# EAGLE board experimentboard (EAGLE 7.7.0)
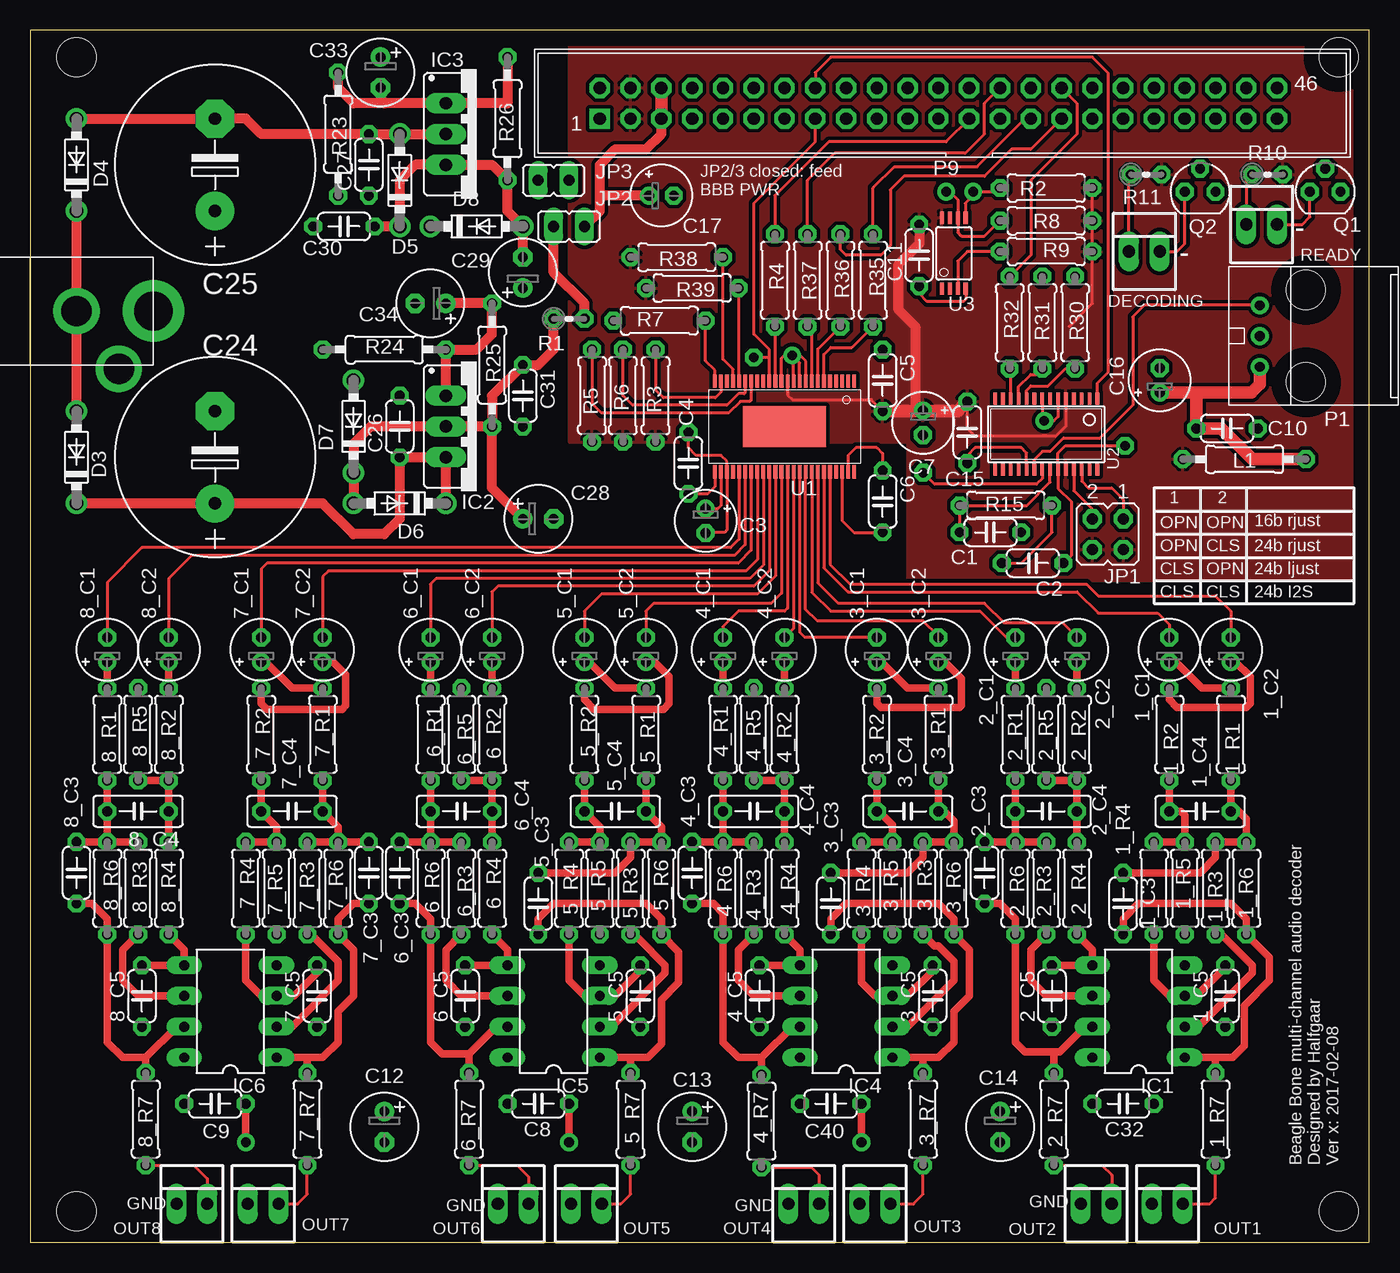
[diagram p0: board, top side]
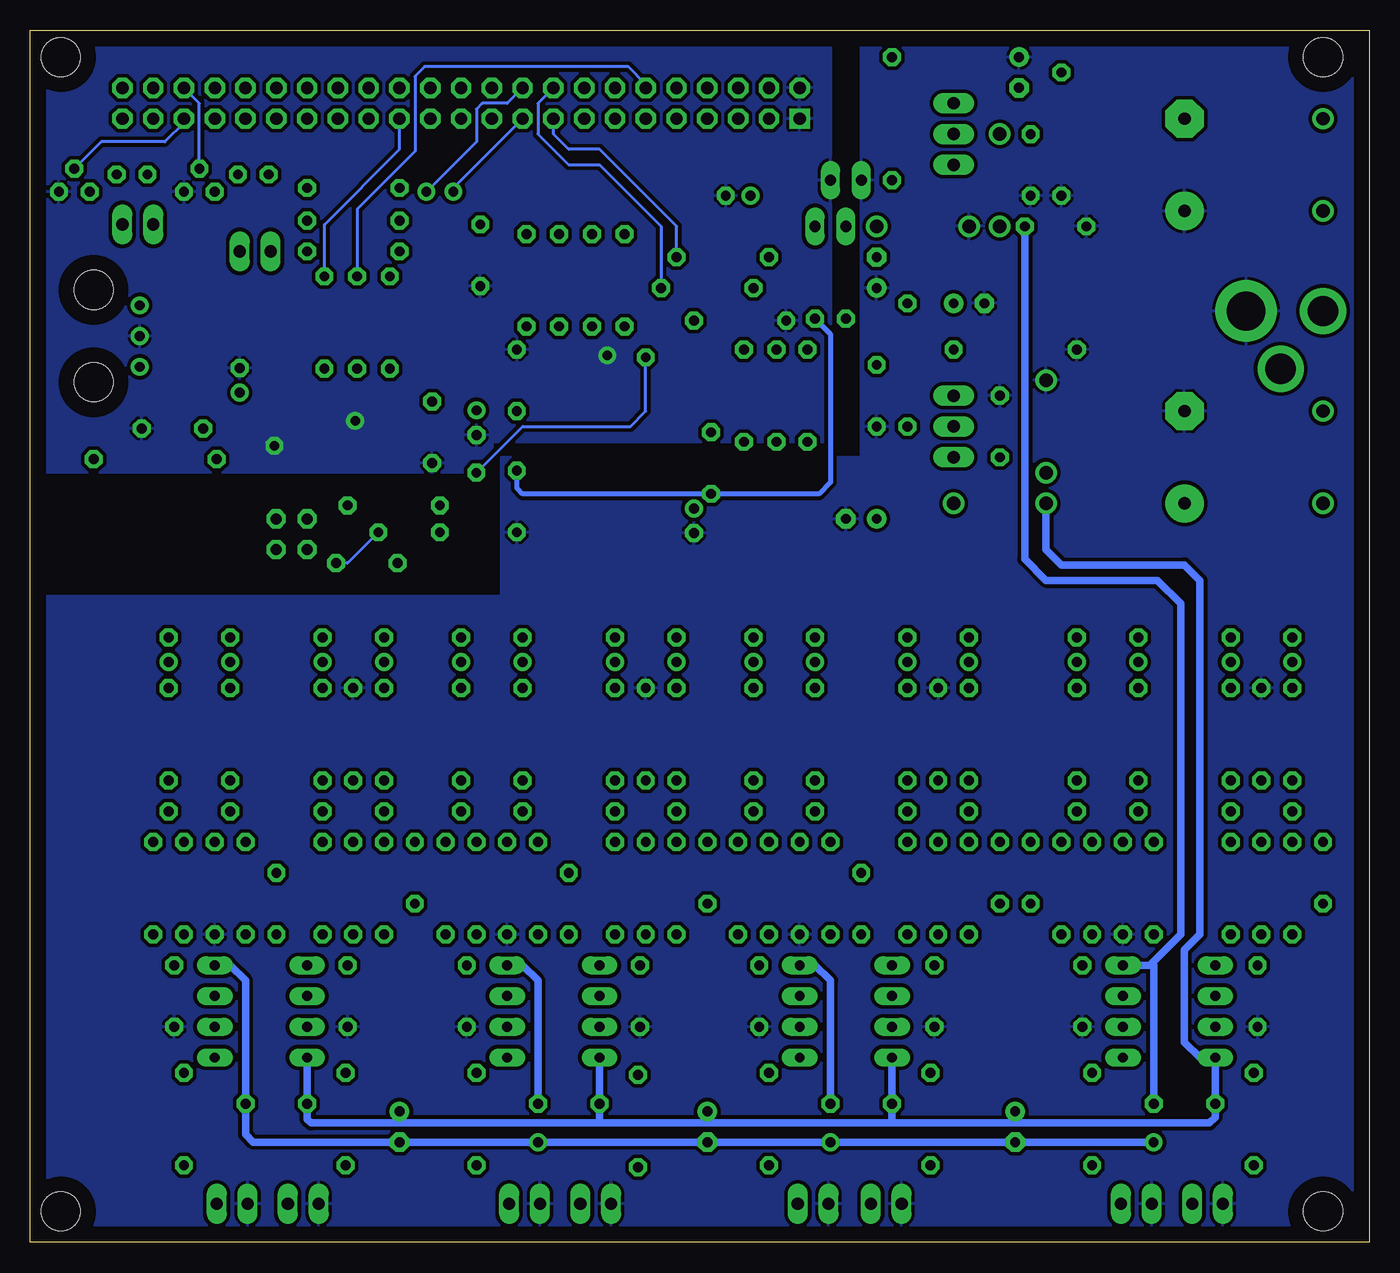
[diagram p1: board, bottom side, seen from below]

Size 110.47 x 100 mm. Coordinates in mm from the lower left corner, seen from the top.
Outline: 0,0 110.47,0 110.47,100 0,100 0,0
Copper layers (1*16): Top 0.035mm / dielectric 1.6mm / Bottom 0.035mm
Design rules "verysmall": minimum track width 10mil, minimum drill 31mil, track to track 9mil, track to pad 8mil, pad to pad 7mil, via to via 20mil, smd to smd 7mil, copper to edge 50mil, drill to drill 40mil, minimum pad ring 13mil, minimum via ring 13mil, stop-mask expansion 4mil, vias tented up to drill 0mil, thermal gap 10mil
Holes 3.2 mm at 3.81,97.79 107.95,97.79 107.95,2.54 3.81,2.54

## Footprints (pad centres in the part's own frame; a part is rotated, then mirrored left to right if it is on the bottom)
E2-5 = drill 0.813 pad 1.27: + -1.016,0 | drill 0.813 pad 1.27 octagon: - 1.016,0
C050-024X044 = drill 0.813 octagon: 1 -2.54,0; 2 2.54,0
C050-025X075 = drill 0.813 octagon: 1 -2.54,0; 2 2.54,0
0207/7 = drill 0.813 octagon: 1 -3.81,0; 2 3.81,0
ADAPTER-PLUG-5.5MM = drill 2.5 pad 3.81: 1 4.445,-7.62; 2 -0.318,-11.113 | drill 3.2 pad 5.08: 3 4.445,-13.97
E2,5-6 = drill 0.813 pad 1.6: + -1.27,0 | drill 0.813 pad 1.6 octagon: - 1.27,0
E7,5-16 = drill 1.016 pad 3.15: + -3.81,0 | drill 1.016 pad 3.15 octagon: - 3.81,0
DO41-7.6 = drill 1.1 pad 1.7: A 3.81,0; C -3.81,0
22-23-2021 = drill 1 long: 1 -1.27,0; 2 1.27,0
DIL8 = drill 0.813 long: 1 -3.81,-3.81; 2 -1.27,-3.81; 3 1.27,-3.81; 4 3.81,-3.81; 5 3.81,3.81; 6 1.27,3.81; 7 -1.27,3.81; 8 -3.81,3.81
317TS = drill 1.016 long: 1 -2.54,-2.54; 2 0,-2.54; 3 2.54,-2.54
337TS = drill 1.016 long: 1 -2.54,-2.54; 2 0,-2.54; 3 2.54,-2.54
JP2Q = drill 0.914 octagon: 1 -1.27,-1.27; 2 1.27,-1.27; 3 -1.27,1.27; 4 1.27,1.27
JP1 = drill 0.914 long: 1 0,-1.27; 2 0,1.27
0207/10 = drill 0.813 octagon: 1 -5.08,0; 2 5.08,0
PLR135/T9 = drill 0.8 pad 1.422: 1 8.255,11.43; 2 5.715,11.43; 3 3.175,11.43 | hole 3.2: 1.905,7.62; 9.525,7.62
HEADERS23-2 = drill 1.016 square: 1 -5.08,-1.27 | drill 1.016 octagon: 2 -5.08,1.27; 3 -2.54,-1.27; 4 -2.54,1.27; 5 0,-1.27; 6 0,1.27; 7 2.54,-1.27; 8 2.54,1.27; 9 5.08,-1.27; 10 5.08,1.27; 11 7.62,-1.27; 12 7.62,1.27; 13 10.16,-1.27; 14 10.16,1.27; 15 12.7,-1.27; 16 12.7,1.27; 17 15.24,-1.27; 18 15.24,1.27; 19 17.78,-1.27; 20 17.78,1.27; 21 20.32,-1.27; 22 20.32,1.27; 23 22.86,-1.27; 24 22.86,1.27; 25 25.4,-1.27; 26 25.4,1.27; 27 27.94,-1.27; 28 27.94,1.27; 29 30.48,-1.27; 30 30.48,1.27; 31 33.02,-1.27; 32 33.02,1.27; 33 35.56,-1.27; 34 35.56,1.27; 35 38.1,-1.27; 36 38.1,1.27; 37 40.64,-1.27; 38 40.64,1.27; 39 43.18,-1.27; 40 43.18,1.27; 41 45.72,-1.27; 42 45.72,1.27; 43 48.26,-1.27; 44 48.26,1.27; 45 50.8,-1.27; 46 50.8,1.27
SOT54E = drill 0.813 octagon: D -1.27,0; G 0,1.905; S 1.27,0
0204V = drill 0.813 octagon: 1 -1.27,0; 2 1.27,0
HTSSOP48DFD = smd 0.3 x 1.1: 1 -5.75,-3.75; 2 -5.25,-3.75; 3 -4.75,-3.75; 4 -4.25,-3.75; 5 -3.75,-3.75; 6 -3.25,-3.75; 7 -2.75,-3.75; 8 -2.25,-3.75; 9 -1.75,-3.75; 10 -1.25,-3.75; 11 -0.75,-3.75; 12 -0.25,-3.75; 13 0.25,-3.75; 14 0.75,-3.75; 15 1.25,-3.75; 16 1.75,-3.75; 17 2.25,-3.75; 18 2.75,-3.75; 19 3.25,-3.75; 20 3.75,-3.75; 21 4.25,-3.75; 22 4.75,-3.75; 23 5.25,-3.75; 24 5.75,-3.75; 25 5.75,3.75; 26 5.25,3.75; 27 4.75,3.75; 28 4.25,3.75; 29 3.75,3.75; 30 3.25,3.75; 31 2.75,3.75; 32 2.25,3.75; 33 1.75,3.75; 34 1.25,3.75; 35 0.75,3.75; 36 0.25,3.75; 37 -0.25,3.75; 38 -0.75,3.75; 39 -1.25,3.75; 40 -1.75,3.75; 41 -2.25,3.75; 42 -2.75,3.75; 43 -3.25,3.75; 44 -3.75,3.75; 45 -4.25,3.75; 46 -4.75,3.75; 47 -5.25,3.75; 48 -5.75,3.75 | smd 6.858 x 3.4: EXP 0,0
TSSOP28 = smd 0.305 x 0.991: 1 -4.225,-2.918; 2 -3.575,-2.918; 3 -2.925,-2.918; 4 -2.275,-2.918; 5 -1.625,-2.918; 6 -0.975,-2.918; 7 -0.325,-2.918; 8 0.325,-2.918; 9 0.975,-2.918; 10 1.625,-2.918; 11 2.275,-2.918; 12 2.925,-2.918; 13 3.575,-2.918; 14 4.225,-2.918; 15 4.225,2.918; 16 3.575,2.918; 17 2.925,2.918; 18 2.275,2.918; 19 1.625,2.918; 20 0.975,2.918; 21 0.325,2.918; 22 -0.325,2.918; 23 -0.975,2.918; 24 -1.625,2.918; 25 -2.275,2.918; 26 -2.925,2.918; 27 -3.575,2.918; 28 -4.225,2.918
TSSOP8 = smd 0.35 x 1: 1 -0.975,-2.925; 2 -0.325,-2.925; 3 0.325,-2.925; 4 0.975,-2.925; 5 0.975,2.925; 6 0.325,2.925; 7 -0.325,2.925; 8 -0.975,2.925

## Placement (x,y rotation side)
1_C1  10 µF  [E2-5]  93.98,48.9 90 top
1_C2  10 µF  [E2-5]  99.06,48.9 90 top
1_C3  680pF  [C050-024X044]  90.17,27.94 270 top
1_C4  3.3nF  [C050-025X075]  96.52,35.56 0 top
1_C5  680pF  [C050-024X044]  98.58,20.32 90 top
1_R1  7.5k  [0207/7]  99.06,41.91 270 top
1_R2  7.5k  [0207/7]  93.98,41.91 270 top
1_R3  360  [0207/7]  97.79,29.21 270 top
1_R4  360  [0207/7]  92.71,29.21 270 top
1_R5  5.6k  [0207/7]  95.25,29.21 90 top
1_R6  5.6k  [0207/7]  100.33,29.21 270 top
1_R7  47  [0207/7]  97.79,10.16 270 top
2_C1  10 µF  [E2-5]  81.28,48.9 90 top
2_C2  10 µF  [E2-5]  86.36,48.9 90 top
2_C3  680pF  [C050-024X044]  78.74,30.48 270 top
2_C4  3.3nF  [C050-025X075]  83.82,35.56 180 top
2_C5  680pF  [C050-024X044]  84.3,20.32 90 top
2_R1  7.5k  [0207/7]  81.28,41.91 270 top
2_R2  7.5k  [0207/7]  86.36,41.91 270 top
2_R3  360  [0207/7]  83.82,29.21 270 top
2_R4  360  [0207/7]  86.36,29.21 270 top
2_R5  5.6k  [0207/7]  83.82,41.91 270 top
2_R6  5.6k  [0207/7]  81.28,29.21 270 top
2_R7  47  [0207/7]  84.45,10.16 270 top
3_C1  10 µF  [E2-5]  69.85,48.9 90 top
3_C2  10 µF  [E2-5]  74.93,48.9 90 top
3_C3  680pF  [C050-024X044]  66.04,27.94 270 top
3_C4  3.3nF  [C050-025X075]  72.39,35.56 0 top
3_C5  680pF  [C050-024X044]  74.45,20.32 90 top
3_R1  7.5k  [0207/7]  74.93,41.91 270 top
3_R2  7.5k  [0207/7]  69.85,41.91 270 top
3_R3  360  [0207/7]  73.66,29.21 270 top
3_R4  360  [0207/7]  68.58,29.21 270 top
3_R5  5.6k  [0207/7]  71.12,29.21 90 top
3_R6  5.6k  [0207/7]  76.2,29.21 270 top
3_R7  47  [0207/7]  73.66,10.16 270 top
4_C1  10 µF  [E2-5]  57.15,48.9 90 top
4_C2  10 µF  [E2-5]  62.23,48.9 90 top
4_C3  680pF  [C050-024X044]  54.61,30.48 270 top
4_C4  3.3nF  [C050-025X075]  59.69,35.56 180 top
4_C5  680pF  [C050-024X044]  60.17,20.32 90 top
4_R1  7.5k  [0207/7]  57.15,41.91 270 top
4_R2  7.5k  [0207/7]  62.23,41.91 270 top
4_R3  360  [0207/7]  59.69,29.21 270 top
4_R4  360  [0207/7]  62.23,29.21 270 top
4_R5  5.6k  [0207/7]  59.69,41.91 270 top
4_R6  5.6k  [0207/7]  57.15,29.21 270 top
4_R7  47  [0207/7]  60.33,10 270 top
5_C1  10 µF  [E2-5]  45.72,48.9 90 top
5_C2  10 µF  [E2-5]  50.8,48.9 90 top
5_C3  680pF  [C050-024X044]  41.91,27.94 270 top
5_C4  3.3nF  [C050-025X075]  48.26,35.56 0 top
5_C5  680pF  [C050-024X044]  50.32,20.32 90 top
5_R1  7.5k  [0207/7]  50.8,41.91 270 top
5_R2  7.5k  [0207/7]  45.72,41.91 270 top
5_R3  360  [0207/7]  49.53,29.21 270 top
5_R4  360  [0207/7]  44.45,29.21 270 top
5_R5  5.6k  [0207/7]  46.99,29.21 90 top
5_R6  5.6k  [0207/7]  52.07,29.21 270 top
5_R7  47  [0207/7]  49.53,10.16 270 top
6_C1  10 µF  [E2-5]  33.02,48.9 90 top
6_C2  10 µF  [E2-5]  38.1,48.9 90 top
6_C3  680pF  [C050-024X044]  30.48,30.48 270 top
6_C4  3.3nF  [C050-025X075]  35.56,35.56 180 top
6_C5  680pF  [C050-024X044]  35.88,20.32 90 top
6_R1  7.5k  [0207/7]  33.02,41.91 270 top
6_R2  7.5k  [0207/7]  38.1,41.91 270 top
6_R3  360  [0207/7]  35.56,29.21 270 top
6_R4  360  [0207/7]  38.1,29.21 270 top
6_R5  5.6k  [0207/7]  35.56,41.91 270 top
6_R6  5.6k  [0207/7]  33.02,29.21 270 top
6_R7  47  [0207/7]  36.2,10.16 270 top
7_C1  10 µF  [E2-5]  19.05,48.9 90 top
7_C2  10 µF  [E2-5]  24.13,48.9 90 top
7_C3  680pF  [C050-024X044]  27.94,30.48 270 top
7_C4  3.3nF  [C050-025X075]  21.59,35.56 0 top
7_C5  680pF  [C050-024X044]  23.65,20.32 90 top
7_R1  7.5k  [0207/7]  24.13,41.91 270 top
7_R2  7.5k  [0207/7]  19.05,41.91 270 top
7_R3  360  [0207/7]  22.86,29.21 270 top
7_R4  360  [0207/7]  17.78,29.21 270 top
7_R5  5.6k  [0207/7]  20.32,29.21 90 top
7_R6  5.6k  [0207/7]  25.4,29.21 270 top
7_R7  47  [0207/7]  22.86,10.16 270 top
8_C1  10 µF  [E2-5]  6.35,48.9 90 top
8_C2  10 µF  [E2-5]  11.43,48.9 90 top
8_C3  680pF  [C050-024X044]  3.81,30.48 270 top
8_C4  3.3nF  [C050-025X075]  8.89,35.56 180 top
8_C5  680pF  [C050-024X044]  9.21,20.32 90 top
8_R1  7.5k  [0207/7]  6.35,41.91 270 top
8_R2  7.5k  [0207/7]  11.43,41.91 270 top
8_R3  360  [0207/7]  8.89,29.21 270 top
8_R4  360  [0207/7]  11.43,29.21 270 top
8_R5  5.6k  [0207/7]  8.89,41.91 270 top
8_R6  5.6k  [0207/7]  6.35,29.21 270 top
8_R7  47  [0207/7]  9.53,10.16 270 top
AC  ADAPTER-PLUG-5.5MM  [ADAPTER-PLUG-5.5MM]  -3.81,72.39 90 top
C1  4.7n  [C050-024X044]  79.22,58.58 180 top
C2  68n  [C050-024X044]  82.71,56.04 180 top
C3  10 µF  [E2-5]  55.72,59.53 270 top
C4  1µF ml  [C050-024X044]  54.29,64.29 270 top
C5  1µF ml  [C050-024X044]  70.33,71.12 270 top
C6  1µF ml  [C050-024X044]  70.33,61.12 270 top
C7  22uF  [E2-5]  73.66,67.63 270 top
C8  100nf  [C050-024X044]  41.91,11.43 0 top
C9  100nf  [C050-024X044]  15.24,11.43 0 top
C10  100nf  [C050-024X044]  98.74,67.15 180 top
C11  100nf  [C050-024X044]  73.34,81.44 90 top
C12  100uF/25V  [E2,5-6]  29.21,9.53 270 top
C13  100uF/25V  [E2,5-6]  54.61,9.53 270 top
C14  100uF/25V  [E2,5-6]  80.01,9.53 270 top
C15  1µF ml  [C050-024X044]  77.31,66.83 270 top
C16  10 µF  [E2-5]  93.19,71.12 90 top
C17  10 µF  [E2-5]  52.07,86.36 0 top
C24  4700uF/25V  [E7,5-16]  15.24,64.77 90 top
C25  4700uF/25V  [E7,5-16]  15.24,88.9 90 top
C26  100nF  [C050-024X044]  30.48,67.31 90 top
C27  100nF  [C050-024X044]  27.94,88.9 90 top
C28  100uF/25V  [E2,5-6]  41.91,59.69 0 top
C29  100uF/25V  [E2,5-6]  40.64,80.01 90 top
C30  100nF  [C050-024X044]  25.88,83.82 0 top
C31  100nF  [C050-024X044]  40.64,69.85 270 top
C32  100nf  [C050-024X044]  90.17,11.43 0 top
C33  22µF/25V  [E2,5-6]  28.89,96.52 270 top
C34  22µF/25V  [E2,5-6]  33.02,77.47 180 top
C40  100nf  [C050-024X044]  66.04,11.43 0 top
D3  1N4004  [DO41-7.6]  3.81,64.77 90 top
D4  1N4004  [DO41-7.6]  3.81,88.9 90 top
D5  1N4004  [DO41-7.6]  30.48,87.63 90 top
D6  1N4004  [DO41-7.6]  30.48,60.96 180 top
D7  1N4004  [DO41-7.6]  26.67,67.31 90 top
D8  1N4004  [DO41-7.6]  36.83,83.82 0 top
DECODING  22-23-2021  [22-23-2021]  91.92,81.76 0 top
IC1  OPA2134  [DIL8]  91.44,19.05 90 top
IC2  LM317  [317TS]  36.83,67.31 270 top
IC3  LM337  [337TS]  36.83,91.44 270 top
IC4  OPA2134  [DIL8]  67.31,19.05 90 top
IC5  OPA2134  [DIL8]  43.18,19.05 90 top
IC6  OPA2134  [DIL8]  16.51,19.05 90 top
JP1  [JP2Q]  88.9,58.42 180 top
JP2  [JP1]  44.45,83.82 90 top
JP3  [JP1]  43.18,87.63 90 top
L1  47uH  [0207/10]  100.17,64.61 180 top
OUT1  22-23-2021  [22-23-2021]  93.82,3.17 0 top
OUT2  22-23-2021  [22-23-2021]  87.95,3.17 0 top
OUT3  22-23-2021  [22-23-2021]  69.69,3.17 0 top
OUT4  22-23-2021  [22-23-2021]  63.82,3.17 0 top
OUT5  22-23-2021  [22-23-2021]  45.88,3.17 0 top
OUT6  22-23-2021  [22-23-2021]  39.85,3.17 0 top
OUT7  22-23-2021  [22-23-2021]  19.21,3.17 0 top
OUT8  22-23-2021  [22-23-2021]  13.34,3.17 0 top
P1  PLR135/T9  [PLR135/T9]  112.87,69.06 90 top
P9  P9  [HEADERS23-2]  52.07,93.98 0 top
Q1  BS170  [SOT54E]  106.84,86.68 0 top
Q2  BS170  [SOT54E]  96.52,86.68 0 top
R1  0  [0204V]  44.45,76.2 0 top
R2  5.6k  [0207/7]  83.82,87 0 top
R3  10k  [0207/7]  51.59,69.85 90 top
R4  22  [0207/7]  61.44,79.38 270 top
R5  10k  [0207/7]  46.35,69.85 90 top
R6  10k  [0207/7]  48.9,69.85 90 top
R7  10k  [0207/7]  51.91,76.04 0 top
R8  5.6k  [0207/7]  83.82,84.3 0 top
R9  5.6k  [0207/7]  83.82,81.76 0 top
R10  68  [0204V]  102.08,88.11 0 top
R11  68  [0204V]  92.08,88.11 0 top
R15  680  [0207/7]  80.49,60.8 0 top
R23  715  [0207/10]  25.4,91.44 270 top
R24  715  [0207/10]  29.21,73.66 0 top
R25  240  [0207/10]  38.1,72.39 270 top
R26  240  [0207/10]  39.37,92.71 90 top
R30  22  [0207/7]  86.2,75.88 270 top
R31  22  [0207/7]  83.5,75.88 270 top
R32  22  [0207/7]  80.8,75.88 270 top
R35  22  [0207/7]  69.53,79.38 270 top
R36  22  [0207/7]  66.83,79.38 270 top
R37  22  [0207/7]  64.14,79.38 270 top
R38  5.6k  [0207/7]  53.34,81.28 180 top
R39  5.6k  [0207/7]  54.61,78.74 180 top
READY  22-23-2021  [22-23-2021]  101.6,83.98 0 top
U1  PCM1690  [HTSSOP48DFD]  62.23,67.31 180 top
U2  DIR9001  [TSSOP28]  83.82,66.67 180 top
U3  CAT24C256YI-GT3  [TSSOP8]  76.2,81.6 0 top

## Library data of the parts
1_C1-1_C5 1_R1-1_R7 2_C1-2_C5 2_R1-2_R7 3_C1-3_C5 3_R1-3_R7 4_C1-4_C5 4_R1-4_R7 5_C1-5_C5 5_R1-5_R7 6_C1-6_C5 6_R1-6_R7 7_C1-7_C5 7_R1-7_R7 8_C1-8_C5 8_R1-8_R7 C1-C17 C24-C34 C40 L1 R1-R11 R15 R23-R26 R30-R32 R35-R39 = rcl
AC IC1 IC4-IC6 P1 P9 U1-U3 = 0000halfgaar
D3-D8 = diode
DECODING OUT1-OUT8 READY = con-molex; MF: MOLEX; MPN: 22-23-2021; OC_FARNELL: 1462926; OC_NEWARK: 25C3832
IC2 IC3 = v-reg
JP1-JP3 = jumper
Q1 Q2 = transistor-small-signal

## Nets
ACLKR: P9.12 R31.1
ACLKX: P9.31 R36.1
AGND: 1_C5.1 1_R5.1 2_C5.1 2_R5.1 3_C5.1 3_R5.1 4_C5.1 4_R5.1 5_C5.1 5_R5.1 6_C5.1 6_R5.1 7_C5.1 7_R5.1 8_C5.1 8_R5.1 AC.3 C3.- C4.1 C6.2 C24.- C25.+ C26.2 C27.1 C28.- C29.+ C30.1 C31.2 C33.+ C34.- D7.A D8.C JP3.2 OUT1.1 OUT2.1 OUT3.1 OUT4.1 OUT5.1 OUT6.1 OUT7.1 OUT8.1 R23.2 R24.1 U1.27 U1.46
AHCLKX: P9.29 R35.1
CAPE_I2C_SCL: P9.19 R8.1 U3.6
CAPE_I2C_SDA: P9.20 R2.1 U3.5
DGND: C1.1 C2.1 C5.1 C7.- C10.1 C11.1 C15.2 C16.- C17.- JP3.1 P1.2 P9.1 P9.2 Q1.S Q2.S R7.1 U1.9 U1.10 U1.11 U1.13 U2.6 U2.8 U2.19 U2.23 U3.4
DIN: P9.32 R32.1
DIR_AUDIO: P9.16 U2.1
DOUT: P9.28 R37.1
FILT: C1.2 R15.1 U2.22
FSR: P9.27 R30.1
MCLK: P9.25 R4.1
N$2: R3.2 U1.23
N$4: Q1.D READY.2
N$5: R4.2 U1.14
N$6: C2.2 R15.2
N$7: JP1.2 U2.25
N$8: JP1.1 U2.26
N$9: 3_C4.1 3_R2.2 3_R4.1 3_R5.2
N$10: 3_C3.1 3_C4.2 3_R1.2 3_R3.1 3_R6.1
N$11: R5.2 U1.18
N$12: C10.2 C16.+ L1.1 P1.3
N$13: 1_C4.1 1_R2.2 1_R4.1 1_R5.2
N$14: 2_C4.1 2_R2.2 2_R4.1 2_R5.2
N$15: 2_C3.1 2_C4.2 2_R1.2 2_R3.1 2_R6.1
N$16: 3_C5.2 3_R4.2 IC4.3
N$17: R6.2 U1.19
N$18: 1_C3.1 1_C4.2 1_R1.2 1_R3.1 1_R6.1
N$19: R7.2 U1.24
N$20: P1.1 U2.20
N$21: 3_C3.2 3_R6.2 3_R7.1 IC4.1
N$22: 3_R3.2 IC4.2
N$23: 1_R3.2 IC1.2
N$24: 1_C5.2 1_R4.2 IC1.3
N$25: 1_C2.+ 1_R2.1
N$26: 1_C3.2 1_R6.2 1_R7.1 IC1.1
N$27: 1_C1.+ 1_R1.1
N$28: R10.1 READY.1
N$29: 7_C4.1 7_R2.2 7_R4.1 7_R5.2
N$30: 2_C5.2 2_R4.2 IC1.5
N$31: 2_C3.2 2_R6.2 2_R7.1 IC1.7
N$32: 2_R3.2 IC1.6
N$33: 2_C2.+ 2_R2.1
N$34: 2_C1.+ 2_R1.1
N$35: 7_C3.1 7_C4.2 7_R1.2 7_R3.1 7_R6.1
N$36: 7_C5.2 7_R4.2 IC6.3
N$37: 1_R7.2 OUT1.2
N$38: 2_R7.2 OUT2.2
N$39: C24.+ C26.1 D3.C D6.C IC2.3
N$40: AC.1 D3.A D4.C
N$41: C25.- C27.2 D4.A D5.A IC3.2
N$42: C33.- IC3.1 R23.1 R26.2
N$43: C34.+ IC2.1 R24.2 R25.1
N$44: 3_C2.+ 3_R2.1
N$45: 3_C1.+ 3_R1.1
N$46: 7_C3.2 7_R6.2 7_R7.1 IC6.1
N$47: 7_R3.2 IC6.2
N$48: 4_C4.1 4_R2.2 4_R4.1 4_R5.2
N$49: 4_C3.1 4_C4.2 4_R1.2 4_R3.1 4_R6.1
N$50: 4_C5.2 4_R4.2 IC4.5
N$51: R32.2 U2.12
N$52: R31.2 U2.11
N$53: R30.2 U2.10
N$54: R9.1 U3.3
N$55: 4_C3.2 4_R6.2 4_R7.1 IC4.7
N$56: 4_R3.2 IC4.6
N$57: 4_C2.+ 4_R2.1
N$58: 4_C1.+ 4_R1.1
N$59: 7_C2.+ 7_R2.1
N$60: 7_C1.+ 7_R1.1
N$61: R37.2 U1.8
N$62: R36.2 U1.7
N$63: R35.2 U1.6
N$64: 3_R7.2 OUT3.2
N$65: 4_R7.2 OUT4.2
N$66: 5_C4.1 5_R2.2 5_R4.1 5_R5.2
N$67: 5_C3.1 5_C4.2 5_R1.2 5_R3.1 5_R6.1
N$68: 5_C5.2 5_R4.2 IC5.3
N$69: 5_C3.2 5_R6.2 5_R7.1 IC5.1
N$70: 5_R3.2 IC5.2
N$71: 5_C2.+ 5_R2.1
N$72: 5_C1.+ 5_R1.1
N$73: 8_C4.1 8_R2.2 8_R4.1 8_R5.2
N$74: 8_C3.1 8_C4.2 8_R1.2 8_R3.1 8_R6.1
N$75: 6_C4.1 6_R2.2 6_R4.1 6_R5.2
N$76: 6_C3.1 6_C4.2 6_R1.2 6_R3.1 6_R6.1
N$77: 6_C5.2 6_R4.2 IC5.5
N$78: 6_C3.2 6_R6.2 6_R7.1 IC5.7
N$79: 6_R3.2 IC5.6
N$80: 6_C2.+ 6_R2.1
N$81: 6_C1.+ 6_R1.1
N$82: 5_R7.2 OUT5.2
N$83: 6_R7.2 OUT6.2
N$84: 8_C5.2 8_R4.2 IC6.5
N$85: 8_C3.2 8_R6.2 8_R7.1 IC6.7
N$86: 8_R3.2 IC6.6
N$87: 8_C2.+ 8_R2.1
N$88: 8_C1.+ 8_R1.1
N$89: 7_R7.2 OUT7.2
N$90: 8_R7.2 OUT8.2
N$91: DECODING.2 Q2.D
N$92: DECODING.1 R11.1
N$93: P9.41 Q1.G
N$94: P9.42 Q2.G
RST: P9.15 U1.15 U2.21
SCL: P9.17 R38.1 U1.21
SDA: P9.18 R39.1 U1.20
V+: C8.1 C9.1 C12.+ C13.+ C14.+ C28.+ C31.1 C32.1 C40.1 D6.A D7.C IC1.8 IC2.2 IC4.8 IC5.8 IC6.8 R1.1 R25.2
V-: C8.2 C9.2 C12.- C13.- C14.- C29.- C30.2 C32.2 C40.2 D5.C D8.A IC1.4 IC3.3 IC4.4 IC5.4 IC6.4 R26.1
VCC: C4.2 C6.1 JP2.2 R1.2 U1.25 U1.47
VCOM: C3.+ U1.26
VDD: C5.2 C7.+ C11.2 C15.1 JP1.3 JP1.4 L1.2 P9.3 P9.4 R2.2 R3.1 R5.1 R6.1 R8.2 R9.2 R10.2 R11.2 R38.2 R39.2 U1.12 U2.5 U2.24 U3.8
VDD_5V: C17.+ JP2.1 P9.5 P9.6
VOUT1+: 1_C1.- U1.43
VOUT1-: 1_C2.- U1.44
VOUT2+: 2_C1.- U1.41
VOUT2-: 2_C2.- U1.42
VOUT3+: 3_C1.- U1.39
VOUT3-: 3_C2.- U1.40
VOUT4+: 4_C1.- U1.37
VOUT4-: 4_C2.- U1.38
VOUT5+: 5_C1.- U1.35
VOUT5-: 5_C2.- U1.36
VOUT6+: 6_C1.- U1.33
VOUT6-: 6_C2.- U1.34
VOUT7+: 7_C1.- U1.31
VOUT7-: 7_C2.- U1.32
VOUT8+: 8_C1.- U1.29
VOUT8-: 8_C2.- U1.30

## Tracks (layer width: path | path; a pad name or v marks a point on that pad's centre or on a via)
ACLKR
  Bottom 0.254: R31.1 83.5,85.25 78.74,90.01 78.74,96.2 77.95,97 61.12,97 59.69,95.57 P9.12
ACLKX
  Top 0.254: R36.1 66.83,81.92 67.31,81.44 70.17,81.44 70.96,82.23 70.96,86.84 72.07,87.95 78.74,87.95 80.96,90.17 82.55,90.17 P9.31
AGND
  Top 0.254: U1.46 66.98,59.54 67.94,58.58 C6.2 | C4.1 54.29,65.56 54.93,64.93 56.99,64.93 57.48,64.44 U1.27 57.48,58.75 57.31,58.58 55.78,58.58 C3.-
  pour Bottom (isolate 0.305): 1.27,99.06 1.27,1.27 109.22,1.27 109.22,53.34 71.6,53.34 71.6,64.77 41.91,64.77 41.91,99.06
AHCLKX
  Top 0.254: P9.29 82.07,92.71 78.11,88.74 71.28,88.74 69.53,87 R35.1
CAPE_I2C_SCL  (via drill 0.8)
  Top 0.254: v75.56,86.68 75.88,86.68 76.52,86.04 76.52,84.53 U3.6 76.53,83.34 76.83,83.03 78.74,83.03 R8.1
  Bottom 0.254: v75.56,86.68 75.56,87 P9.19
CAPE_I2C_SDA  (via drill 0.8)
  Top 0.254: U3.5 77.15,84.55 77.15,85.72 77.79,86.36 v77.79,86.68 79.69,86.68 R2.1
  Bottom 0.254: P9.20 71.12,93.98 73.18,93.98 73.66,93.5 73.66,90.81 v77.79,86.68
DGND  (via drill 0.8)
  Top 0.254: U1.13 61.98,72.93 62.23,73.18 v62.87,73.18 | U1.11 62.98,73.07 v62.87,73.18 | v62.87,73.18 63.5,73.18 63.98,72.7 U1.9 | U1.10 63.48,72.57 v62.87,73.18 | 77.31,64.61 C15.2 77.31,64.93 77.95,65.56 81.76,65.56 82.19,65.12 U2.19 | U3.4 77.17,77.81 76.99,77.63 73.98,77.63 73.34,78.26 C11.1 | U2.8 83.5,67.95 v83.66,67.79 84.45,67.79 84.8,68.13 U2.6 | C2.1 85.88,56.67 85.88,61.12 84.8,62.21 U2.23 84.8,65.11 85.41,65.72 v90.33,65.72
  Bottom 0.254: C1.1 84.3,56.04 C2.1
  pour Bottom (isolate 0.305): 44.45,66.04 72.39,66.04 72.39,63.5 109.22,63.5 109.22,99.06 44.45,99.06
DIN
  Top 0.254: P9.32 86.36,93.98 86.36,91.44 82.55,87.63 82.55,81.44 R32.1
DIR_AUDIO
  Top 0.254: P9.16 64.77,96.52 66.04,97.79 87.63,97.79 88.9,96.52 88.9,71.75 88.05,70.9 U2.1
DOUT
  Top 0.254: R37.1 64.14,87.63 66.36,89.85 77.15,89.85 78.74,91.44 78.74,93.98 P9.28
FILT
  Top 0.254: U2.22 84.14,62.71 82.23,60.8 R15.1 C1.2
FSR
  Bottom 0.254: R30.1 86.2,83.98 80.01,90.17 P9.27
MCLK
  Top 0.254: P9.25 75.56,90.81 65.88,90.81 61.44,86.36 R4.1
N$2
  Top 0.254: R3.2 51.59,70.33 52.23,69.69 56.52,69.69 56.98,70.16 U1.23
N$4
  Top 0.254: READY.2 104.93,83.98 105.57,84.61 Q1.D
N$5
  Top 0.254: U1.14 61.48,75.52 R4.2
N$6
  Top 0.254: C2.2 81.76,56.04 84.3,58.58 R15.2
N$7
  Top 0.254: U2.25 86.09,62.02 87.63,60.48 JP1.2
N$8
  Top 0.254: U2.26 86.75,62.8 87.31,62.23 89.22,62.23 90.17,61.28 JP1.1
N$9
  Top 0.61: 3_R4.1 3_R5.2 71.12,34.45 70.01,35.56 3_C4.1 3_R2.2
N$10
  Top 0.61: 3_R1.2 3_C4.2 75.41,35.56 76.2,34.77 3_R6.1 3_R3.1 73.66,31.75 72.39,30.48 3_C3.1
N$11
  Top 0.254: U1.18 59.48,69.48 59.37,69.37 58.58,69.37 57.63,68.42 47.15,68.42 46.35,69.22 R5.2
N$12
  Top 1.016: L1.1 100.81,64.61 98.27,67.15 C10.2 96.2,69.85 | 96.2,69.85 96.2,70.1 100.74,70.1 101.44,70.8 P1.3 | C16.+ 95.95,70.1 96.2,69.85
N$13
  Top 0.61: 1_R2.2 1_C4.1 94.93,35.56 95.25,35.24 1_R5.2 1_R4.1
N$14
  Top 0.61: 2_R4.1 2_C4.1 2_R2.2 2_R5.2
N$15
  Top 0.61: 2_C3.1 2_R6.1 | 2_R3.1 2_R6.1 | 2_R6.1 2_C4.2 2_R1.2
N$16
  Top 0.61: 3_R4.2 68.58,21.43 69.69,20.32 IC4.3 72.39,20.32 74.45,22.38 3_C5.2
N$17
  Top 0.254: U1.19 58.98,70.09 58.9,70.01 58.42,70.01 57.47,69.06 49.69,69.06 48.9,69.85 R6.2
N$18
  Top 0.61: 1_R1.2 1_C4.2 99.69,35.56 100.33,34.92 1_R6.1 1_R3.1 97.79,31.75 96.52,30.48 1_C3.1
N$19
  Top 0.254: U1.24 56.48,71.95 55.72,72.71 R7.2
N$20
  Top 0.254: P1.1 91.92,77.31 90.96,76.36 90.96,69.06 88.27,66.36 85.25,66.36 84.14,65.25 83.5,65.25 82.84,64.59 U2.20
N$21
  Top 0.61: 73.66,15.24 74.93,15.24 76.2,16.51 76.2,19.05 77.47,20.32 77.47,24.13 3_R6.2 76.2,26.67 74.93,27.94 67.31,27.94 66.04,26.67 3_C3.2 | 73.66,15.24 IC4.1 | 3_R7.1 73.66,15.24
N$22
  Top 0.61: IC4.2 72.39,17.78 76.2,21.59 76.2,23.18 74.93,24.45 74.61,24.45 3_R3.2
N$23
  Top 0.61: 1_R3.2 98.27,25.4 100.81,22.86 100.81,22.23 96.36,17.78 IC1.2
N$24
  Top 0.61: 1_R4.2 92.71,21.59 93.98,20.32 IC1.3 96.2,20.32 98.58,22.7 1_C5.2
N$25
  Top 0.61: 1_R2.1 93.98,44.77 94.61,44.13 100.33,44.13 100.65,44.45 100.65,46.67 99.44,47.88 1_C2.+
N$26
  Top 0.61: 97.79,15.24 99.22,15.24 100.17,16.19 100.17,19.53 102.23,21.59 102.23,23.5 1_R6.2 100.33,26.67 99.06,27.94 91.44,27.94 90.17,26.67 1_C3.2 | 97.79,15.24 IC1.1 | 1_R7.1 97.79,15.24
N$27
  Top 0.61: 1_R1.1 96.68,45.72 94.52,47.88 1_C1.+
N$28
  Top 0.254: R10.1 100.33,87.63 READY.1
N$29
  Top 0.61: 7_R4.1 7_R5.2 20.32,34.29 7_C4.1 7_R2.2
N$30
  Top 0.61: 2_R4.2 87.63,24.13 IC1.5 2_C5.2
N$31
  Top 0.61: 2_C3.2 80.01,27.94 81.28,26.67 2_R6.2 81.28,16.51 82.07,15.72 84.45,15.72 | IC1.7 87,17.78 84.93,15.72 84.45,15.72 | 2_R7.1 84.45,15.72
N$32
  Top 0.61: IC1.6 83.82,20.32 82.55,21.59 82.55,24.13 2_R3.2
N$33
  Top 0.61: 2_R2.1 2_C2.+
N$34
  Top 0.61: 2_R1.1 2_C1.+
N$35
  Top 0.61: 7_C3.1 7_R6.1 | 7_R6.1 7_R3.1 | 7_R6.1 25.4,34.29 7_C4.2 7_R1.2
N$36
  Top 0.61: 7_R4.2 17.78,21.59 19.05,20.32 IC6.3 21.75,20.32 23.65,22.23 7_C5.2
N$37
  Top 0.254: OUT1.2 97.31,3.17 97.79,3.65 1_R7.2
N$38
  Top 0.254: 2_R7.2 88.42,6.35 89.22,5.56 OUT2.2
N$39
  Top 0.813: D6.C IC2.3 C26.1 30.48,59.69 29.21,58.42 26.67,58.42 24.13,60.96 C24.+ D3.C
N$40
  Top 0.813: D3.A AC.1 D4.C
N$41
  Top 0.813: D4.A C25.- 17.78,92.71 19.05,91.44 C27.2 D5.A IC3.2
N$42
  Top 0.813: R26.2 39.37,93.98 IC3.1 29.21,93.98 | 29.21,93.98 26.67,93.98 25.4,95.25 R23.1 | C33.- 28.89,94.3 29.21,93.98
N$43
  Top 0.813: IC2.1 R24.2 36.83,73.66 38.1,74.93 R25.1 C34.+
N$44
  Top 0.61: 3_R2.1 69.85,44.45 70.17,44.13 76.68,44.13 76.83,44.29 76.83,46.51 75.47,47.88 3_C2.+
N$45
  Top 0.61: 3_C1.+ 70.23,47.88 72.39,45.72 3_R1.1
N$46
  Top 0.61: 7_C3.2 26.67,27.94 25.4,26.67 7_R6.2 26.67,24.13 26.67,20.32 25.4,19.05 25.4,16.51 24.13,15.24 22.86,15.24 | 22.86,15.24 IC6.1 | 7_R7.1 22.86,15.24
N$47
  Top 0.61: IC6.2 21.59,17.78 25.4,21.59 25.4,23.18 23.5,25.08 23.18,25.08 7_R3.2
N$48
  Top 0.61: 4_R4.1 4_C4.1 4_R2.2 4_R5.2
N$49
  Top 0.61: 4_C3.1 4_R6.1 | 4_R6.1 4_R3.1 | 4_R6.1 4_C4.2 4_R1.2
N$50
  Top 0.61: 4_R4.2 63.5,24.13 IC4.5 4_C5.2
N$51
  Top 0.254: U2.12 80.89,71.98 R32.2
N$52
  Top 0.254: U2.11 81.55,70.59 82.55,71.6 83.03,71.6 R31.2
N$53
  Top 0.254: U2.10 82.19,70.29 82.55,70.64 83.98,70.64 85.41,72.07 R30.2
N$54
  Top 0.254: R9.1 77.31,81.76 76.52,80.96 76.52,78.68 U3.3
N$55
  Top 0.61: 4_C3.2 56.36,27.94 57.15,27.15 4_R6.2 57.15,16.51 58.42,15.24 60.33,15.24 | IC4.7 62.87,17.78 60.33,15.24 | 4_R7.1 60.33,15.24
N$56
  Top 0.61: IC4.6 59.69,20.32 58.42,21.59 58.42,24.13 4_R3.2
N$57
  Top 0.61: 4_R2.1 4_C2.+
N$58
  Top 0.61: 4_R1.1 4_C1.+
N$59
  Top 0.61: 7_R2.1 19.05,44.45 19.53,43.97 25.72,43.97 26.04,44.29 26.04,46.83 24.99,47.88 7_C2.+
N$60
  Top 0.61: 7_C1.+ 19.43,47.88 21.59,45.72 7_R1.1
N$61
  Top 0.254: U1.8 64.48,75.22 R37.2
N$62
  Top 0.254: U1.7 64.98,73.71 R36.2
N$63
  Top 0.254: U1.6 65.48,73.26 66.04,73.82 67.79,73.82 R35.2
N$64
  Top 0.254: OUT3.2 72.87,3.17 73.66,3.97 3_R7.2
N$65
  Top 0.254: 4_R7.2 64.45,6.19 65.09,5.56 OUT4.2
N$66
  Top 0.61: 5_R4.1 5_R5.2 46.99,34.29 5_C4.1 5_R2.2
N$67
  Top 0.61: 5_R1.2 5_C4.2 52.07,34.29 5_R6.1 5_R3.1 49.53,31.75 48.26,30.48 5_C3.1
N$68
  Top 0.61: 5_R4.2 44.45,21.59 45.72,20.32 IC5.3 48.26,20.32 50.32,22.38 5_C5.2
N$69
  Top 0.61: 49.53,15.24 50.96,15.24 52.07,16.35 52.07,20 53.5,21.43 53.5,23.97 5_R6.2 52.07,26.67 50.8,27.94 43.18,27.94 41.91,26.67 5_C3.2 | 49.53,15.24 IC5.1 | 5_R7.1 49.53,15.24
N$70
  Top 0.61: IC5.2 47.94,17.78 52.39,22.23 52.39,22.86 50.16,25.08 49.85,25.08 5_R3.2
N$71
  Top 0.61: 5_R2.1 45.72,44.77 46.51,43.97 52.23,43.97 52.7,44.45 52.7,46.67 51.5,47.88 5_C2.+
N$72
  Top 0.61: 5_R1.1 48.26,45.72 46.1,47.88 5_C1.+
N$73
  Top 0.61: 8_R4.1 8_C4.1 8_R2.2 8_R5.2
N$74
  Top 0.61: 8_C3.1 8_R6.1 | 8_R6.1 8_C4.2 8_R1.2 | 8_R6.1 8_R3.1
N$75
  Top 0.61: 6_R4.1 6_C4.1 6_R2.2 6_R5.2
N$76
  Top 0.61: 6_C3.1 6_R6.1 | 6_R3.1 6_R6.1 | 6_R6.1 6_C4.2 6_R1.2
N$77
  Top 0.61: 6_C5.2 IC5.5 39.37,24.13 6_R4.2
N$78
  Top 0.61: 6_C3.2 31.75,27.94 33.02,26.67 6_R6.2 33.02,16.51 33.97,15.56 36.2,15.56 | IC5.7 38.42,17.78 36.2,15.56 | 6_R7.1 36.2,15.56
N$79
  Top 0.61: IC5.6 35.56,20.32 34.29,21.59 34.29,24.13 6_R3.2
N$80
  Top 0.61: 6_R2.1 6_C2.+
N$81
  Top 0.61: 6_R1.1 6_C1.+
N$82
  Top 0.254: OUT5.2 48.74,3.17 49.53,3.97 5_R7.2
N$83
  Top 0.254: 6_R7.2 40.16,6.35 41.12,5.4 OUT6.2
N$84
  Top 0.61: 8_C5.2 IC6.5 12.7,24.13 8_R4.2
N$85
  Top 0.61: IC6.7 12.06,17.78 9.53,15.24 | 8_C3.2 5.08,27.94 6.35,26.67 8_R6.2 6.35,16.51 7.62,15.24 9.53,15.24 | 9.53,15.24 8_R7.1
N$86
  Top 0.61: IC6.6 8.89,20.32 7.62,21.59 7.62,24.13 8_R3.2
N$87
  Top 0.61: 8_R2.1 8_C2.+
N$88
  Top 0.61: 8_R1.1 8_C1.+
N$89
  Top 0.254: OUT7.2 22.07,3.17 22.86,3.97 7_R7.2
N$90
  Top 0.254: 8_R7.2 13.49,6.35 14.61,5.24 OUT8.2
N$91
  Top 0.254: DECODING.2 94.61,81.76 95.25,82.39 Q2.D
N$92
  Top 0.254: DECODING.1 90.65,87.95 R11.1
N$93
  Bottom 0.254: P9.41 97.79,92.39 99.38,90.81 104.62,90.81 Q1.G
N$94
  Bottom 0.254: Q2.G 96.52,93.98 P9.42
RST  (via drill 0.8)
  Top 0.254: U1.15 60.98,72.87 | 60.98,72.87 60.98,73.64 59.69,74.93 59.69,85.72 64.77,90.81 P9.15 | v59.69,73.03 60.82,73.03 60.98,72.87 | U2.21 83.5,63.02 83.03,62.55 74.61,62.55 v73.66,63.5
  Bottom 0.254: v73.66,63.5 69.85,67.31 60.96,67.31 59.69,68.58 v59.69,73.03
SCL
  Top 0.254: U1.21 57.98,72.04 57.15,72.87 R38.1
  Bottom 0.254: R38.1 57.15,83.82 63.5,90.17 66.04,90.17 67.31,91.44 P9.17
SDA
  Top 0.254: U1.20 58.48,78.68 R39.1
  Bottom 0.254: P9.18 68.58,93.98 68.58,91.44 66.04,88.9 63.5,88.9 58.42,83.82 R39.1
V+
  Top 0.813: D6.A D7.C 26.67,65.88 28.1,67.31 IC2.2 R25.2 | R25.2 38.1,69.85 C31.1 41.91,72.39 43.18,73.66 R1.1 | C28.+ 38.1,62.23 R25.2
  Bottom 0.61: IC4.8 C40.1 63.5,9.84 | IC1.8 C32.1 87.63,10.16 87.31,9.84 80.01,9.84 | 39.37,9.84 C8.1 IC5.8 | 39.37,9.84 29.21,9.84 | 29.21,9.84 13.18,9.84 12.7,10.32 C9.1 IC6.8 13.97,15.24 15.24,16.51 15.24,24.13 13.97,25.4 13.97,54.61 15.24,55.88 25.4,55.88 26.67,57.15 D6.A | 39.37,9.84 54.61,9.84 | 54.61,9.84 63.5,9.84 | 63.5,9.84 80.01,9.84 | C12.+ 29.21,9.84 | C13.+ 54.61,9.84 | C14.+ 80.01,9.84
V-  (via drill 0.8)
  Top 0.61: C9.2 v17.78,8.26 | v68.58,8.26 C40.2 | v44.45,8.26 C8.2
  Top 0.813: C30.2 D5.C 30.48,87.63 31.75,88.9 IC3.3 38.1,88.9 R26.1 39.37,85.09 D8.A C29.-
  Bottom 0.61: C9.2 17.78,22.86 17.94,23.02 | C8.2 44.45,21.59 45.72,22.86 IC5.4 | C40.2 68.58,21.59 69.85,22.86 IC4.4 | IC1.4 93.98,22.86 92.71,21.59 C32.2 92.71,8.89 92.08,8.26 C14.- v68.58,8.26 C13.- v44.45,8.26 C12.- v17.78,8.26 | IC6.4 18.1,22.86 17.94,23.02 | 17.94,23.02 15.56,25.4 15.56,52.7 17.46,54.61 26.67,54.61 28.42,56.36 C30.2
VCC
  Top 0.254: U1.47 67.47,63.57 67.47,64.93 68.1,65.56 69.85,65.56 70.33,65.09 C6.1 | U1.25 56.48,62.35 55.88,61.75 C4.2
  Top 0.813: R1.2 45.72,77.47 43.18,80.01 JP2.2
  Bottom 0.406: C6.1 70.33,62.23 69.85,61.75 C4.2 45.4,61.75 44.45,62.71 44.45,74.93 R1.2
VCOM
  Top 0.254: C3.+ 56.74,60.55 56.99,60.8 56.98,60.81 U1.26
VDD
  Top 0.254: U1.12 62.48,69.92 62.87,69.53 69.37,69.53 C5.2 | 85.72,75.56 87.63,77.47 R9.2 R8.2 R2.2 | U2.5 85.44,67.35 84.61,66.52 77.95,66.52 77.31,67.15 77.31,68.58 76.91,68.98
  Top 0.813: C11.2 73.34,82.39 71.6,80.64 71.6,76.99 73.03,75.56 73.03,68.58
  Top 1.016: C15.1 76.91,68.98 76.52,68.58 73.72,68.58 C7.+ 73.6,68.58 73.03,68.58 C5.2
  pour Top (isolate 0.305): 44.45,99.06 44.45,66.04 72.39,66.04 72.39,54.61 109.22,54.61 109.22,99.06
VDD_5V
  Top 0.813: JP2.1 46.99,85.09 46.99,86.36 | 46.99,86.36 46.99,88.9 48.26,90.17 50.8,90.17 52.07,91.44 P9.5 | C17.+ 46.99,86.36
  Top 1.016: P9.6 P9.5
VOUT1+
  Top 0.254: U1.43 65.48,55.65 67.47,53.66 86.36,53.66 88.11,51.91 93.03,51.91 93.98,50.96 1_C1.-
VOUT1-
  Top 0.254: U1.44 65.98,55.94 67.63,54.29 87.15,54.29 88.11,53.34 97.79,53.34 99.06,52.07 1_C2.-
VOUT2+
  Top 0.254: U1.41 64.48,53.63 66.04,52.07 78.36,52.07 80.52,49.91 2_C1.-
VOUT2-
  Top 0.254: 86.36,49.53 2_C2.- 85.15,51.12 80.33,51.12 78.74,52.7 66.67,52.7 64.98,54.4 U1.42
VOUT3+
  Top 0.254: U1.39 63.48,50.34 63.91,49.91 3_C1.-
VOUT3-
  Top 0.254: U1.40 63.98,52.23 64.93,51.28 73.66,51.28 74.93,50.01 3_C2.-
VOUT4+
  Top 0.254: U1.37 62.48,52.32 62.23,52.07 58.42,52.07 57.15,50.8 4_C1.-
VOUT4-
  Top 0.254: U1.38 62.98,50.66 4_C2.-
VOUT5+
  Top 0.254: U1.35 61.48,54.97 60.01,53.5 47.15,53.5 45.72,52.07 5_C1.-
VOUT5-
  Top 0.254: U1.36 61.98,53.57 61.12,52.7 51.44,52.7 50.8,52.07 5_C2.-
VOUT6+
  Top 0.254: U1.33 60.48,55.88 59.37,54.77 33.5,54.77 33.02,54.29 6_C1.-
VOUT6-
  Top 0.254: U1.34 60.98,55.42 59.69,54.13 38.58,54.13 38.1,53.66 6_C2.-
VOUT7+
  Top 0.254: U1.31 59.48,57.1 58.42,56.04 19.53,56.04 19.05,55.56 7_C1.-
VOUT7-
  Top 0.254: U1.32 59.98,56.33 59.05,55.4 24.61,55.4 24.13,54.93 7_C2.-
VOUT8+
  Top 0.254: U1.29 58.48,58 57.78,57.31 9.21,57.31 6.35,54.45 8_C1.-
VOUT8-
  Top 0.254: U1.30 58.98,57.55 58.1,56.67 13.34,56.67 11.43,54.77 8_C2.-

## Text on the board
tPlace: JP2/3 closed: feed / BBB PWR | - | - | 1 | 2 | OPN | OPN | 16b rjust | OPN | CLS | 24b rjust | CLS | OPN | 24b ljust | CLS | CLS | 24b I2S | Beagle Bone multi-channel audio decoder / Designed by Halfgaar / Ver x: 2017-02-08 | GND | GND | GND | GND